# Altium PCB CM4IOv5.PcbDoc (part 4 of 4)
Units mm, origin at the board's own origin, x right, y up, seen from the top; angles counter-clockwise.
Board outline 160 x 90 mm, 4 copper layers (F.Cu, In1.Cu, In2.Cu, B.Cu); 151 components, 247 nets, 944 pads, 782 vias.
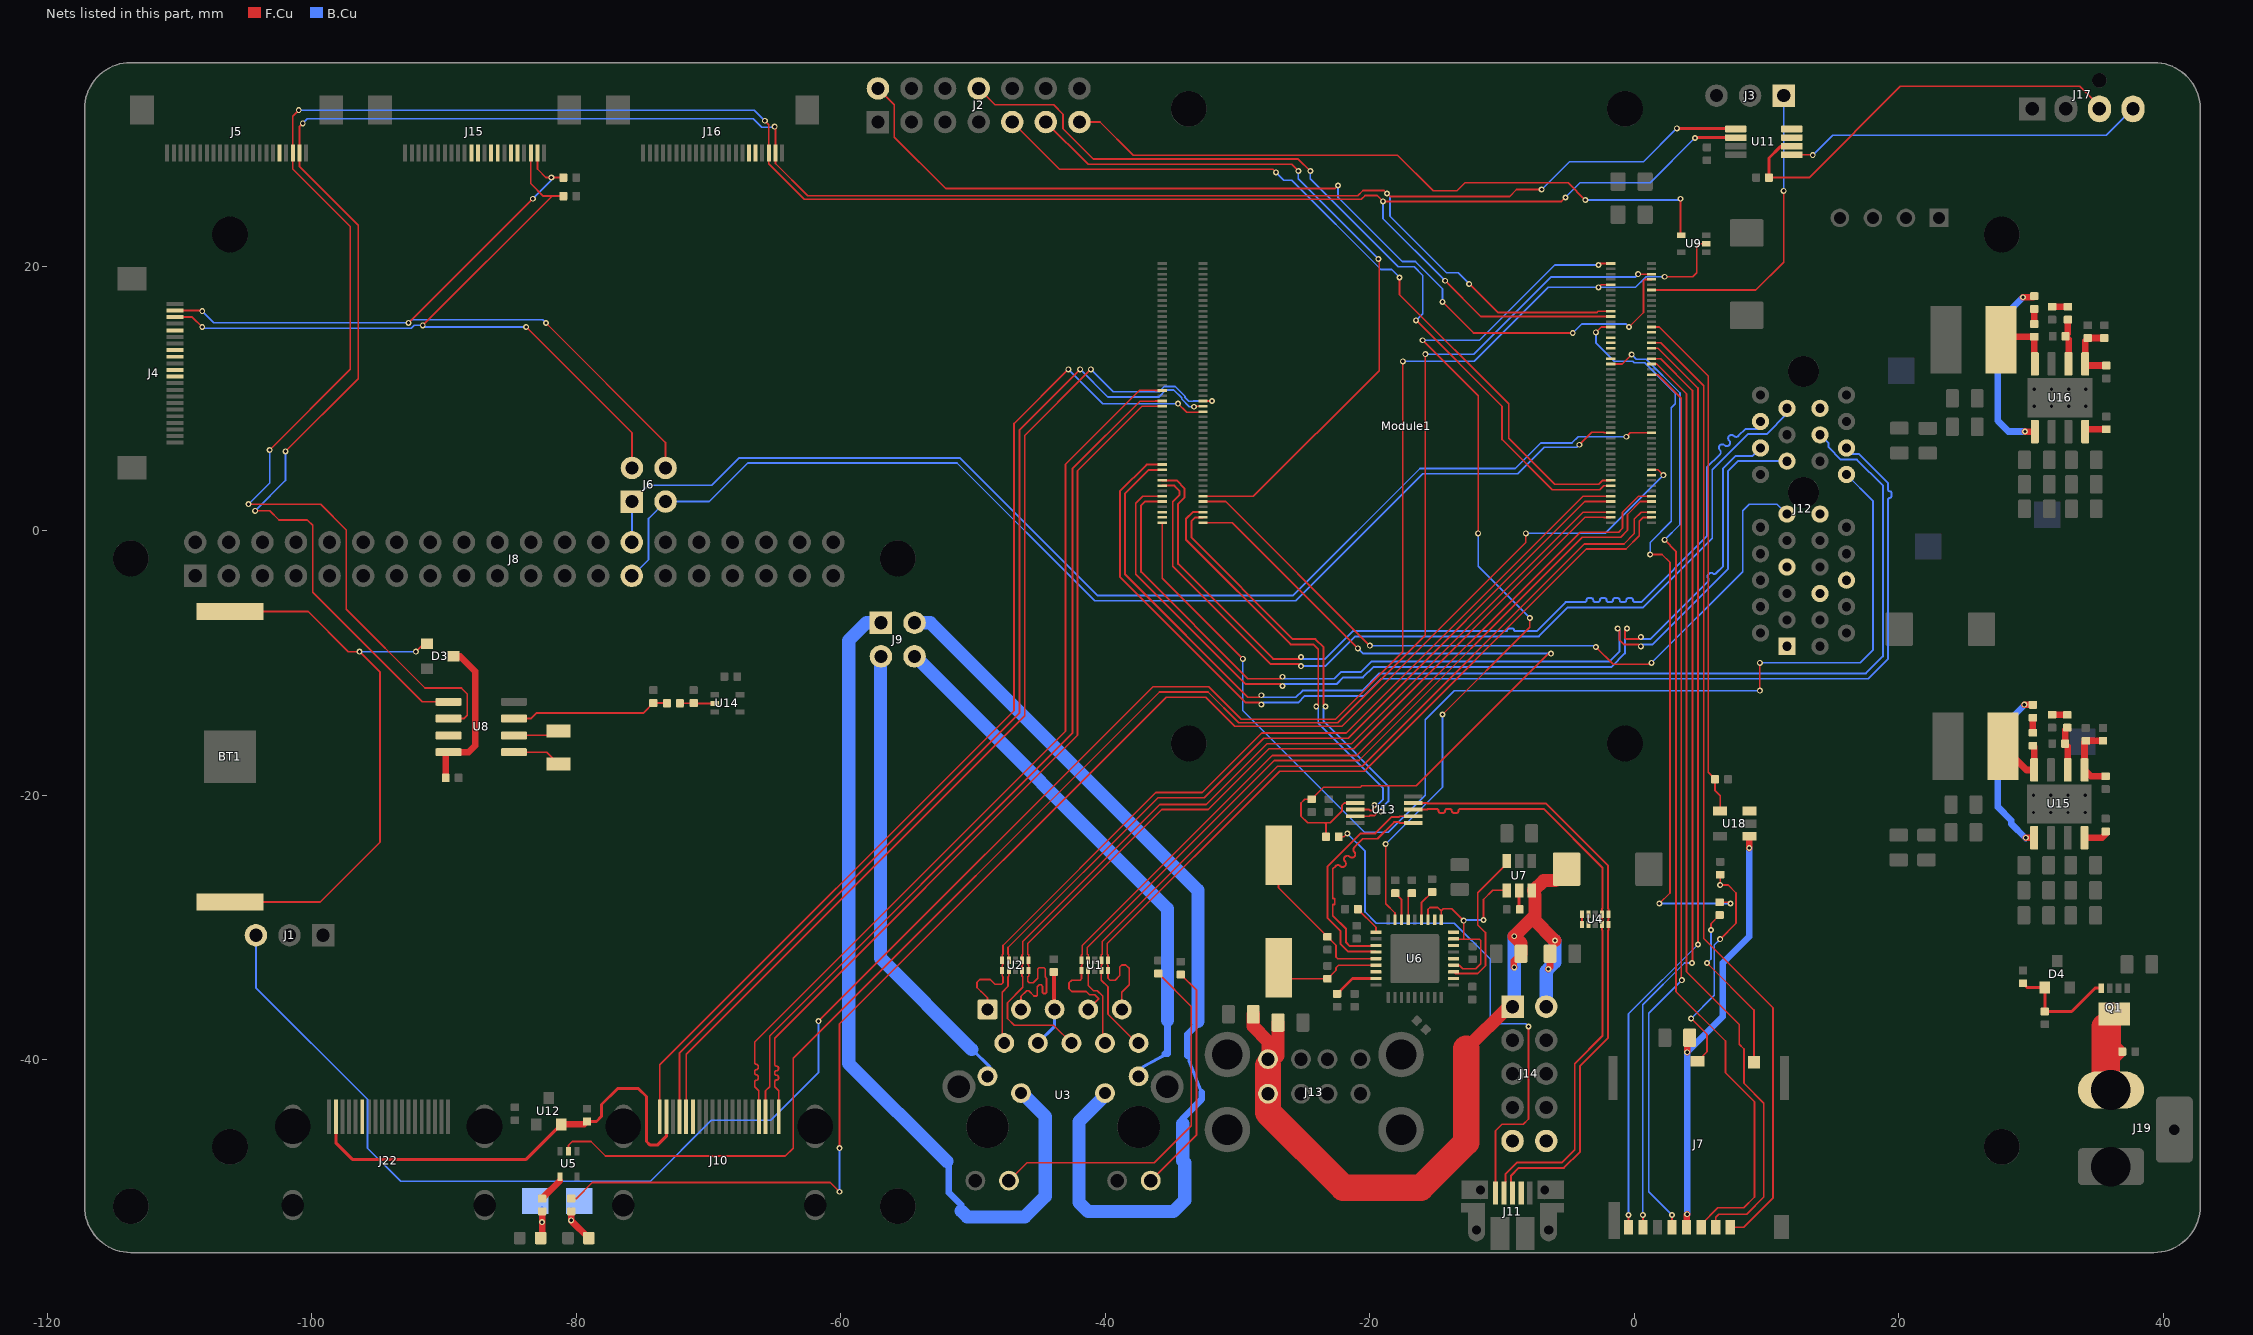
[diagram p6: the nets of this part, all layers, seen from the top]

## Via types
v1: diameter 0.45, hole 0.25, F.Cu to B.Cu, tented both sides, 782 vias

## Nets (pads, with @x,y where several pads share a name; then routed paths per layer and width w, separated by ;. In a path a pad name is that pad's centre, name@x,y a point inside that pad or via, vN(x,y) a via of type N, cw(c..) or ccw(c..) an arc to the next point about the centre after c; other vN are vias at no path point) (continued)
HDMI1_D1_P: J10.4 Module1.152 | length 69.4
  F.Cu w0.127: J10.4@-66.2,-44.32 -66.2,-42.37 -66.51,-42.06 -66.51,-41.69 -66.507,-41.662 -66.498,-41.636 -66.483,-41.612 -66.463,-41.592 -66.439,-41.577 -66.413,-41.568 -66.357,-41.562 -66.331,-41.553 -66.307,-41.538 -66.287,-41.518 -66.272,-41.494 -66.263,-41.468 -66.26,-41.44 -66.26,-41.29 -66.263,-41.262 -66.272,-41.236 -66.287,-41.212 -66.307,-41.192 -66.331,-41.177 -66.357,-41.168 -66.413,-41.162 -66.439,-41.153 -66.463,-41.138 -66.483,-41.118 -66.498,-41.094 -66.507,-41.068 -66.51,-41.04 -66.51,-40.89 -66.507,-40.862 -66.498,-40.836 -66.483,-40.812 -66.463,-40.792 -66.439,-40.777 -66.413,-40.768 -66.357,-40.762 -66.331,-40.753 -66.307,-40.738 -66.287,-40.718 -66.272,-40.694 -66.263,-40.668 -66.26,-40.64 -66.26,-40.49 -66.263,-40.462 -66.272,-40.436 -66.287,-40.412 -66.307,-40.392 -66.331,-40.377 -66.357,-40.368 -66.413,-40.362 -66.439,-40.353 -66.463,-40.338 -66.483,-40.318 -66.498,-40.294 -66.507,-40.268 -66.51,-40.24 -66.51,-38.679 -43.01,-15.179 -43.01,5.021 -37.421,10.61 -36.235,10.61 -36.225,10.6 Module1.152@-35.7,10.6
HDMI1_D2_N: J10.3 Module1.148 | length 67.5
  F.Cu w0.127: J10.3@-65.7,-44.32 -65.7,-42.37 -65.39,-42.06 -65.39,-38.221 -42.49,-15.321 -42.49,4.679 -37.379,9.79 -36.235,9.79 -36.225,9.8 Module1.148@-35.7,9.8
HDMI1_D2_P: J10.1 Module1.146 | length 67.5
  F.Cu w0.127: J10.1@-64.7,-44.32 -64.7,-42.37 -65.01,-42.06 -65.01,-41.69 -65.006,-41.658 -64.996,-41.627 -64.978,-41.6 -64.956,-41.577 -64.928,-41.56 -64.898,-41.549 -64.833,-41.542 -64.803,-41.531 -64.775,-41.514 -64.752,-41.491 -64.735,-41.464 -64.724,-41.433 -64.721,-41.401 -64.721,-41.34 -64.724,-41.308 -64.735,-41.277 -64.752,-41.25 -64.775,-41.227 -64.803,-41.21 -64.833,-41.199 -64.898,-41.192 -64.928,-41.181 -64.956,-41.164 -64.978,-41.141 -64.996,-41.114 -65.006,-41.083 -65.01,-41.051 -65.01,-40.99 -65.006,-40.958 -64.996,-40.927 -64.978,-40.9 -64.956,-40.877 -64.928,-40.86 -64.898,-40.849 -64.833,-40.842 -64.803,-40.831 -64.775,-40.814 -64.752,-40.791 -64.735,-40.764 -64.724,-40.733 -64.721,-40.701 -64.721,-40.64 -64.724,-40.608 -64.735,-40.577 -64.752,-40.55 -64.775,-40.527 -64.803,-40.51 -64.833,-40.499 -64.898,-40.492 -64.928,-40.481 -64.956,-40.464 -64.978,-40.441 -64.996,-40.414 -65.006,-40.383 -65.01,-40.351 -65.01,-38.379 -42.11,-15.479 -42.11,4.521 -37.231,9.4 Module1.146@-35.7,9.4
HDMI1_HOTPLUG: J10.19 Module1.143 | length 80.8
  F.Cu w0.13: J10.19@-73.7,-44.32 -73.7,-40.4 -46.9,-13.6 -46.9,8.1 v1(-42.8,12.2) ; v1(-34.5,9.6) -33.851,8.951 Module1.143@-32.669,8.951
  B.Cu w0.13: v1(-42.8,12.2) -40.2,9.6 v1(-34.5,9.6)
HDMI1_SCL: J10.15 Module1.147 | length 80.4
  F.Cu w0.13: J10.15@-71.7,-44.32 -71.7,-39.6 -46.1,-14 -46.1,7.2 v1(-41.1,12.2) ; Module1.147@-32.62,9.8 -31.934,9.8 v1(-31.93,9.804)
  B.Cu w0.13: v1(-41.1,12.2) -39.4,10.5 -35.932,10.5 -35.532,10.9 -34.722,10.9 -33.969,10.148 -33.969,10.059 -33.698,9.787 -33.348,9.787 -33.331,9.804 v1(-31.93,9.804)
HDMI1_SDA: J10.16 Module1.145 | length 80
  F.Cu w0.13: J10.16@-72.2,-44.32 -72.2,-39.5 -46.5,-13.8 -46.5,7.6 v1(-41.9,12.2) ; v1(-33.296,9.371) -33.267,9.4 Module1.145@-32.62,9.4
  B.Cu w0.13: v1(-41.9,12.2) -39.8,10.1 -35.965,10.1 -35.425,10.64 -34.829,10.64 -34.229,10.04 -34.229,9.951 -33.649,9.371 v1(-33.296,9.371)
HDMI_5v: C13.1 J10.18 J22.18 U12.2 | length 34.4
  F.Cu w0.23: J22.18@-98.2,-44.82 -98.2,-46.3 -96.95,-47.55 -83.8,-47.55 U12.2@-81.15,-44.9 ; C13.1@-79.2,-44.685 -78.485,-44.685 -78.1,-44.3 -78.1,-43.4 -76.9,-42.2 -75.3,-42.2 -74.7,-42.8 -74.7,-46.2 -74.45,-46.45 -73.85,-46.45 -73.2,-45.8 J10.18@-73.2,-44.82
  F.Cu w0.5: U12.2@-81.15,-44.9 C13.1@-79.415,-44.9
ID_SC: J6.1 J8.28 Module1.35 | length 90.9
  F.Cu w0.13: v1(-0.6,7.1) -0.3,7.4 Module1.35@1.3,7.4
  B.Cu w0.13: J8.28@-75.8,-0.87 J6.1@-75.8,2.2 -74.56,3.44 -69.76,3.44 -67.7,5.5 -51,5.5 -40.6,-4.9 -25.8,-4.9 -16.2,4.7 -9,4.7 -7.074,6.626 -4.715,6.626 -4.241,7.1 v1(-0.6,7.1)
ID_SD: J6.3 J8.27 Module1.36 | length 89
  F.Cu w0.13: v1(-4.153,6.495) -3.202,7.446 -2.311,7.446 -2.265,7.4 Module1.36@-1.78,7.4
  B.Cu w0.13: J8.27@-75.81,-3.47 -74.55,-2.21 -74.55,0.91 J6.3@-73.26,2.2 -69.963,2.2 -67.043,5.12 -51.22,5.12 -40.8,-5.3 -25.6,-5.3 -16,4.3 -8.8,4.3 -6.804,6.296 -4.352,6.296 v1(-4.153,6.495)
Net-(BT1-Pad1): BT1.1 D3.1 | length 44.4
  F.Cu w0.13: BT1.1@-106.2,-28.085 -99.385,-28.085 -94.85,-23.55 -94.85,-10.7 v1(-96.4,-9.15) -97.25,-9.15 -100.285,-6.115 BT1.1@-106.2,-6.115 ; v1(-92.15,-9.15) D3.1@-91.55,-8.55
  B.Cu w0.13: v1(-96.4,-9.15) v1(-92.15,-9.15)
Net-(C1-Pad1): C1.1 U3.4 U3.5 | length 5.8
  F.Cu w0.3: U3.5@-43.9,-36.145 C1.1@-43.9,-33.385
  B.Cu w0.23: U3.4@-45.105,-38.75 -43.835,-37.48 U3.5@-43.835,-36.21
Net-(C8-Pad1): C8.1 U6.33 Y1.1 | length 7.1
  F.Cu w0.13: Y1.1@-26.065,-33.885 C8.1@-23.2,-33.885 -22.557,-33.242 -22.557,-33.058 -22.368,-32.868 U6.33@-19.533,-32.868
Net-(C9-Pad1): C9.1 U6.32 Y1.2 | length 12.6
  F.Cu w0.13: Y1.2@-26.9,-24.55 -26.9,-27.015 C9.1@-23.2,-30.715 -22.557,-31.357 -22.557,-32.243 -22.432,-32.368 U6.32@-19.533,-32.368
Net-(C24-Pad1): C24.1 R20.1 U14.2 | length 2.6
  F.Cu w0.13: C24.1@-72.177,-13.056 R20.1@-71.161,-13.056 ; R20.1@-71.099,-13.072 U14.2@-69.532,-13.072
Net-(C29-Pad1): C29.1 R22.2 | length 1.1
  F.Cu w0.5: R22.2@30.15,-15.292 C29.1@30.15,-14.148
Net-(C29-Pad2): C29.2 U15.1 | length 13.1
  F.Cu w0.5: v1(29.5,-13.163) 29.515,-13.177 C29.2@30.15,-13.177 ; v1(29.613,-23.225) U15.1@30.245,-23.225
  B.Cu w0.5: v1@29.5,-13.2 27.5,-15.2 27.5,-20.9 28.5,-21.9 28.5,-22.15 v1@29.613,-23.263
Net-(C36-Pad1): C36.1 J19.1 Q1.5 | length 12.3
  F.Cu w1: 35.6,-37.5 35.6,-37.255 Q1.5@36.3,-36.555 36.3,-39 36.7,-39.4 36.25,-39.85 J19.1@36.25,-42.3
  F.Cu w2: 35.6,-37.5 35.6,-41.4 36.05,-41.85 J19.1@36.05,-42.3
Net-(C40-Pad2): C40.2 D4.2 Q1.4 R26.1 | length 8.6
  F.Cu w0.23: C40.2@29.4,-34.235 29.715,-34.55 D4.2@31.05,-34.55 R26.1@31.05,-36.365 33.085,-36.365 34.85,-34.6 Q1.4@35.325,-34.6
Net-(C46-Pad1): C46.1 D3.3 U8.8 | length 11.7
  F.Cu w0.5: C46.1@-89.885,-18.7 U8.8@-89.885,-16.965 ; U8.8@-89.675,-16.755 -88.155,-16.755 -87.65,-16.25 -87.65,-10.65 -88.8,-9.5 D3.3@-89.3,-9.5
Net-(C57-Pad1): C57.1 R9.2 | length 1.1
  F.Cu w0.5: R9.2@30.25,15.635 C57.1@30.25,16.765
Net-(C57-Pad2): C57.2 U16.1 | length 14
  F.Cu w0.5: v1(29.4,17.65) C57.2@30.165,17.65 ; v1(29.55,7.5) 29.563,7.488 U16.1@30.295,7.488
  B.Cu w0.5: v1(29.4,17.65) 27.5,15.75 27.5,8.3 28.3,7.5 v1(29.55,7.5)
Net-(C58-Pad1): C58.1 U16.4 | length 1.4
  F.Cu w0.5: U16.4@34.283,7.665 C58.1@35.7,7.665
Net-(C59-Pad1): C59.1 R25.1 U16.6 | length 2.9
  F.Cu w0.5: C59.1@32.8,14.88 R25.1@32.8,15.915 ; U16.6@32.85,12.628 C59.1@32.85,14.47
Net-(C60-Pad1): C60.1 R25.2 | length 1.2
  F.Cu w0.5: C60.1@31.6,16.935 R25.2@32.75,16.935
Net-(C61-Pad2): C61.2 R27.2 R28.1 U16.5 | length 4.5
  F.Cu w0.5: U16.5@34.105,12.612 R27.2@34.105,14.37 ; U16.5@34.233,12.485 R28.1@35.7,12.485 ; R27.2@34.3,14.565 C61.2@35.55,14.565
Net-(C62-Pad1): C62.1 U15.4 | length 1.7
  F.Cu w0.5: U15.4@34.055,-23.225 35.388,-23.225 C62.1@35.65,-22.962
Net-(C63-Pad1): C63.1 R23.1 U15.6 | length 2.8
  F.Cu w0.5: C63.1@32.585,-16.113 R23.1@32.585,-15.062 ; U15.6@32.785,-18.1 C63.1@32.785,-16.312
Net-(C64-Pad1): C64.1 R23.2 | length 1.2
  F.Cu w0.5: C64.1@31.6,-13.928 R23.2@32.75,-13.928
Net-(C65-Pad2): C65.2 R24.2 R30.1 U15.5 | length 5.2
  F.Cu w0.5: R24.2@34.055,-15.993 U15.5@34.055,-18.1 34.533,-18.577 R30.1@35.65,-18.577 ; R24.2@34.15,-15.897 C65.2@35.45,-15.897
Net-(D1-Pad1): D1.1 R10.1 TP5.1 | length 3
  F.Cu w0.5: D1.1@-82.6,-53.388 v1(-82.6,-52.3) R10.1@-82.6,-51.485
  B.Cu w0.23: v1(-82.6,-52.3) TP5.1@-82.6,-51.2
Net-(D2-Pad1): D2.1 R1.1 TP3.1 | length 3.4
  F.Cu w0.5: R1.1@-80.4,-51.485 v1(-80.4,-52.162) D2.1@-79.062,-53.5
  B.Cu w0.23: v1(-80.4,-52.162) TP3.1@-80.4,-51.312
Net-(J2-Pad13): J2.13 U9.4 | length 51.1
  F.Cu w0.13: J2.13@-41.96,30.9 -40.4,30.9 -37.9,28.4 -17.9,28.4 -15.2,25.7 -13.4,25.7 -12.8,26.3 -5,26.3 v1(-3.7,25) ; U9.4@3.5,22.4 v1(3.5,25.1)
  B.Cu w0.13: v1(-3.7,25) 3.4,25 v1(3.5,25.1)
Net-(J4-Pad11): J4.11
Net-(J4-Pad12): J4.12
Net-(J4-Pad14): J4.14
Net-(J4-Pad15): J4.15
Net-(J4-Pad18): J4.18
Net-(J5-Pad18): J5.18
Net-(J7-Pad9): J7.9 R18.2 | length 13
  F.Cu w0.13: v1(5.5,-32.7) 9.05,-36.25 J7.9@9.05,-40.21 ; v1(5.8,-30.2) 5.8,-29.72 R18.2@6.45,-29.07
  B.Cu w0.13: v1(5.5,-32.7) 5.8,-32.4 v1(5.8,-30.2)
Net-(J7-Pad10): J7.10 R17.2 | length 17.2
  F.Cu w0.13: v1(4.3,-36.9) 5.5,-38.1 5.5,-39.42 J7.10@4.785,-40.135 ; v1(6.5,-30.9) 7.7,-29.7 7.7,-27.4 7.1,-26.8 v1(6.5,-26.8) R17.2@6.5,-26.02
  B.Cu w0.13: v1(4.3,-36.9) 6.06,-35.14 6.06,-31.34 v1(6.5,-30.9)
Net-(J10-Pad14): J10.14
Net-(J11-Pad1): J11.1 R8.1 | length 40.6
  F.Cu w0.13: R8.1@-22.35,-23.15 -21.95,-23.15 v1(-21.7,-22.9) ; J11.1@-10.5,-50.08 -10.5,-45.4 -10,-44.9 -8.4,-44.9 -8,-44.5 v1(-8,-37.5)
  B.Cu w0.13: v1(-21.7,-22.9) -20.355,-24.245 -20.355,-28.845 -19.5,-29.7 -13.6,-29.7 -10.9,-32.4 -10.9,-37.3 -8.2,-37.3 v1(-8,-37.5)
Net-(J11-Pad4): J11.4
Net-(J12-PadA1): J12.A1
Net-(J12-PadA7): J12.A7
Net-(J12-PadB5): J12.B5
Net-(J12-PadB6): J12.B6
Net-(J12-PadB11): J12.B11
Net-(J12-PadB17): J12.B17
Net-(J14-Pad9): J14.9
Net-(J14-Pad10): J14.10
Net-(J15-Pad11): J15.11
Net-(J15-Pad12): J15.12
Net-(J15-Pad14): J15.14
Net-(J15-Pad15): J15.15
Net-(J15-Pad17): J15.17
Net-(J15-Pad18): J15.18
Net-(J16-Pad17): J16.17
Net-(J16-Pad18): J16.18
Net-(J17-Pad3): J17.3 R21.1 U11.6 | length 31.2
  F.Cu w0.13: R21.1@10.185,26.7 13.225,26.7 20.125,33.6 33.7,33.6 J17.3@35.18,32.12
  F.Cu w0.23: R21.1@10.185,26.7 10.185,28.185 11,29 11.025,29 U11.6@11.1,29.075
Net-(J17-Pad4): J17.4 U11.5 | length 27.2
  F.Cu w0.13: U11.5@11.913,28.425 13.475,28.425 v1(13.5,28.4)
  B.Cu w0.13: v1(13.5,28.4) 15,29.9 35.7,29.9 J17.4@37.7,31.9
Net-(J22-Pad14): J22.14
Net-(L3-Pad1): L3.1 R22.1 U15.8 | length 4.9
  F.Cu w0.5: L3.1@27.875,-16.312 29.663,-18.1 U15.8@30.245,-18.1 R22.1@30.245,-16.358
Net-(L5-Pad1): L5.1 R9.1 U16.8 | length 4.3
  F.Cu w0.5: L5.1@27.94,14.665 R9.1@30.25,14.665 U16.8@30.25,12.658
Net-(Module1-Pad19): Module1.19
Net-(Module1-Pad21): Module1.21 R1.2 | length 116.6
  F.Cu w0.13: R1.2@-80.4,-50.515 -80.015,-50.515 -78.8,-49.3 -60.8,-49.3 v1(-60.1,-50) ; v1(-60.1,-46.7) -60.1,-37.3 -35.4,-12.6 -32.403,-12.6 -30.203,-14.8 -22.1,-14.8 -8.2,-0.9 v1(-8.2,-0.2) ; Module1.21@1.3,4.6 1.8,4.6 v1(2.2,4.2)
  B.Cu w0.13: v1(-60.1,-50) v1(-60.1,-46.7) ; v1(-8.2,-0.2) -2.2,-0.2 v1(2.2,4.2)
Net-(Module1-Pad64): Module1.64
Net-(Module1-Pad68): Module1.68
Net-(Module1-Pad70): Module1.70
Net-(Module1-Pad72): Module1.72
Net-(Module1-Pad73): Module1.73
Net-(Module1-Pad104): Module1.104
Net-(Module1-Pad106): Module1.106
Net-(R2-Pad1): R2.1 U3.16 | length 28.1
  F.Cu w0.13: U3.16@-47.29,-49.16 -45.93,-47.8 -36.3,-47.8 -33.5,-45 -33.5,-35.985 R2.1@-36,-33.485
Net-(R3-Pad1): R3.1 U3.18 | length 17.5
  F.Cu w0.13: U3.18@-36.57,-49.16 -33.1,-45.69 -33.1,-34.77 R3.1@-34.3,-33.57
Net-(R10-Pad2): R10.2 U5.4 | length 1.9
  F.Cu w0.5: R10.2@-82.6,-50.515 U5.4@-81.25,-49.165
Net-(R12-Pad1): R12.1 U6.24 | length 2.1
  F.Cu w0.13: U6.24@-17.096,-29.43 -17.096,-27.7 R12.1@-16.812,-27.416
Net-(R13-Pad1): R13.1 U6.22 | length 2.4
  F.Cu w0.13: U6.22@-16.096,-29.43 -16.096,-28.137 R13.1@-15.288,-27.329
Net-(R14-Pad1): R14.1 U6.28 | length 2.3
  F.Cu w0.13: R14.1@-20.899,-28.622 -19.533,-29.987 U6.28@-19.533,-30.368
Net-(R15-Pad2): R15.2 U6.35 | length 3.4
  F.Cu w0.23: R15.2@-22.475,-35.04 -21.303,-33.868 U6.35@-19.533,-33.868
Net-(R16-Pad1): R16.1 U6.25 | length 2.2
  F.Cu w0.13: R16.1@-18.082,-27.416 -17.596,-27.902 U6.25@-17.596,-29.43
Net-(R36-Pad1): R36.1 U7.5 | length 1.4
  F.Cu w0.23: R36.1@-8.7,-28.615 U7.5@-8.7,-27.2
Net-(U4-Pad1): U4.1 U4.10 | length 0.8
  F.Cu w0.13: U4.1@-3.95,-29.785 U4.10@-3.95,-29.015
Net-(U4-Pad2): U4.2 U4.9 | length 0.8
  F.Cu w0.13: U4.2@-3.45,-29.785 U4.9@-3.45,-29.015
Net-(U6-Pad11): U6.11
Net-(U6-Pad14): U6.14
Net-(U6-Pad16): U6.16
Net-(U6-Pad18): U6.18
Net-(U6-Pad20): U6.20
Net-(U6-Pad34): U6.34
Net-(U8-Pad1): U8.1 Y2.2 | length 3.7
  F.Cu w0.13: U8.1@-84.725,-16.755 -82.245,-16.755 Y2.2@-81.35,-17.65
Net-(U8-Pad2): U8.2 Y2.1 | length 3
  F.Cu w0.13: U8.2@-84.725,-15.485 Y2.1@-81.685,-15.485
Net-(U8-Pad7): U8.7
Net-(U11-Pad7): U11.7
Net-(U11-Pad8): U11.8
Net-(U18-Pad3): U18.3
nEXTRST: Module1.100 U6.26 | length 68.6
  F.Cu w0.13: v1(-18.8,-23.7) -18.8,-28.214 -18.096,-28.918 U6.26@-18.096,-29.43 ; v1(-16,14.4) -11.8,10.2 v1(-11.8,-0.2) ; v1(-14.5,-13.9) -7.9,-7.3 v1(-7.9,-6.6) ; v1(-2.7,20.095) -2.595,20.2 Module1.100@-1.78,20.2
  B.Cu w0.13: v1(-18.8,-23.7) -14.5,-19.4 v1(-14.5,-13.9) ; v1(-16,14.4) -11.7,14.4 -6.005,20.095 v1(-2.7,20.095) ; v1(-11.8,-0.2) -11.8,-2.7 v1(-7.9,-6.6)
nOCS1: U6.13 U6.17 U6.19 U6.21 U7.4 | length 17.4
  F.Cu w0.13: U6.21@-15.596,-29.43 -15.596,-28.646 -15.45,-28.5 -14.85,-28.5 -14.596,-28.754 ; U6.19@-14.596,-29.43 -14.596,-28.754 ; U6.13@-13.658,-32.868 -13.24,-32.868 -12.978,-33.13 -11.98,-33.13 -11.6,-32.75 -11.6,-31 -11.7,-30.9 -12.95,-30.9 ; U6.17@-13.626,-30.9 -12.95,-30.9 ; v1(-11.4,-29.45) -11.4,-27.9 -10.7,-27.2 U7.4@-9.65,-27.2 ; -14.596,-28.754 -14.596,-28.746 -14.45,-28.6 -13.8,-28.6 v1(-12.9,-29.5) -12.9,-30.85 -12.95,-30.9
  B.Cu w0.13: v1(-12.9,-29.5) -12.85,-29.45 v1(-11.4,-29.45)
nPWR_LED: Module1.95 U5.2 | length 128.9
  F.Cu w0.13: U5.2@-80.6,-46.95 -80.6,-46.495 -80.305,-46.2 -78.9,-46.2 -77.8,-47.3 -64.2,-47.3 -63.6,-46.7 -63.6,-39.9 -35.9,-12.2 -32.235,-12.2 -29.915,-14.52 -22.42,-14.52 -15.8,-7.9 v1(-15.8,13.35) ; v1(0.3,19.4) Module1.95@1.3,19.4
  B.Cu w0.13: v1(-15.8,13.35) -12.15,13.35 -6.325,19.175 0.075,19.175 v1(0.3,19.4)
nRPIBOOT: J2.2 Module1.93 | length 72.1
  F.Cu w0.13: J2.2@-57.2,33.44 -55.96,32.2 -55.96,29.76 -52.075,25.875 -22.625,25.875 v1(-22.4,26.1) ; v1(-14.5,17.3) -12.15,14.95 v1(-4.65,14.95) ; v1(-0.4,15.4) 0.7,16.5 0.7,18.88 0.82,19 Module1.93@1.3,19
  B.Cu w0.13: v1(-22.4,26.1) -22.4,25.2 -17.55,20.35 -16.55,20.35 -14.5,18.3 v1(-14.5,17.3) ; v1(-4.65,14.95) -3.975,15.625 -0.625,15.625 v1(-0.4,15.4)
nRTC_INT: C24.2 R19.1 U8.3 | length 12
  F.Cu w0.13: U8.3@-84.725,-14.215 -83.465,-14.215 -83.05,-13.8 -74.953,-13.8 R19.1@-74.186,-13.033 C24.2@-73.17,-13.033
PCIE_CLK_N: J12.A14 Module1.112 | length 73
  F.Cu w0.147: Module1.112@-35.7,2.6 -37.183,2.6 -37.7,2.083 -37.7,-3.283 -29.383,-11.6 -26.75,-11.6 v1(-26.6,-11.75) ; v1(-0.55,-7.4) -0.7,-7.55 -0.7,-8.117 -0.617,-8.2 0.35,-8.2 v1(0.5,-8.05)
  B.Cu w0.147: v1(-26.6,-11.75) -26.45,-11.6 -22.517,-11.6 -22.017,-11.1 -20.517,-11.1 -19.717,-10.3 -1.717,-10.3 -0.7,-9.283 -0.7,-7.55 v1(-0.55,-7.4) ; v1(0.5,-8.05) 0.65,-8.2 1.217,-8.2 5.3,-4.117 5.583,-3.835 5.607,-3.804 5.624,-3.769 5.633,-3.73 5.633,-3.691 5.624,-3.653 5.607,-3.618 5.558,-3.556 5.541,-3.521 5.532,-3.483 5.532,-3.444 5.541,-3.406 5.558,-3.37 5.583,-3.34 5.689,-3.234 5.719,-3.209 5.755,-3.192 5.793,-3.183 5.832,-3.183 5.87,-3.192 5.905,-3.209 5.967,-3.258 6.002,-3.275 6.04,-3.284 6.079,-3.284 6.118,-3.275 6.153,-3.258 6.184,-3.234 6.7,-2.717 6.7,4.683 7.667,5.65 8.95,5.65 J12.A14@9.55,6.25
PCIE_CLK_nREQ: J12.B12 Module1.102 | length 92.6
  F.Cu w0.13: Module1.102@-35.7,0.6 -35.7,-3.6 v1(-29.6,-9.7) ; v1(9.5,-12.1) v1(9.5,-10)
  B.Cu w0.13: v1(-29.6,-9.7) -29.6,-13.6 -20.4,-22.8 -18.6,-22.8 -15.8,-20 -15.8,-14.3 -13.6,-12.1 v1(9.5,-12.1) ; v1(9.5,-10) 17.1,-10 18.05,-9.05 18.05,2.25 J12.B12@16.05,4.25
PCIE_CLK_P: J12.A13 Module1.110 | length 73
  F.Cu w0.147: Module1.110@-35.7,2.2 -37.017,2.2 -37.3,1.917 -37.3,-3.117 -29.217,-11.2 -26.75,-11.2 v1(-26.6,-11.05) ; v1(-1.25,-7.4) -1.1,-7.55 -1.1,-8.283 -0.783,-8.6 0.35,-8.6 v1(0.5,-8.75)
  B.Cu w0.147: v1(-26.6,-11.05) -26.45,-11.2 -22.683,-11.2 -22.183,-10.7 -20.683,-10.7 -19.883,-9.9 -1.883,-9.9 -1.1,-9.117 -1.1,-7.55 v1(-1.25,-7.4) ; v1(0.5,-8.75) 0.65,-8.6 1.383,-8.6 7.1,-2.883 7.1,4.517 7.833,5.25 J12.A13@11.55,5.25
PCIE_nRST: J12.A11 Module1.109 | length 57.3
  F.Cu w0.13: Module1.109@-32.62,2.2 -30.9,2.2 v1(-20,-8.7) ; v1(-2.9,-8.8) -1.6,-10.1 1.2,-10.1 v1(1.3,-10)
  B.Cu w0.13: v1(-20,-8.7) -3,-8.7 v1(-2.9,-8.8) ; v1(1.3,-10) 8.2,-3.1 8.2,1.5 8.7,2 10.8,2 J12.A11@11.55,1.25
PCIE_RX_N: J12.A16 Module1.118 | length 67.9
  F.Cu w0.147: Module1.118@-35.7,3.8 -34.617,3.8 -34,3.183 -34,2.517 -34.5,2.017 -34.5,-2.517 -27.317,-9.7 -25.35,-9.7 v1(-25.2,-9.55)
  B.Cu w0.147: v1(-25.2,-9.55) -25.05,-9.7 -23.383,-9.7 -21.283,-7.6 -9.7,-7.6 -9.678,-7.597 -9.657,-7.59 -9.638,-7.578 -9.622,-7.562 -9.61,-7.543 -9.603,-7.522 -9.597,-7.478 -9.59,-7.457 -9.578,-7.438 -9.562,-7.422 -9.543,-7.41 -9.522,-7.403 -9.5,-7.4 -9.2,-7.4 -9.178,-7.403 -9.157,-7.41 -9.138,-7.422 -9.122,-7.438 -9.11,-7.457 -9.103,-7.478 -9.097,-7.522 -9.09,-7.543 -9.078,-7.562 -9.062,-7.578 -9.043,-7.59 -9.022,-7.597 -9,-7.6 -7.383,-7.6 -5.183,-5.4 -3.75,-5.4 -3.717,-5.396 -3.685,-5.385 -3.656,-5.367 -3.633,-5.344 -3.615,-5.315 -3.604,-5.283 -3.596,-5.217 -3.585,-5.185 -3.567,-5.156 -3.544,-5.133 -3.515,-5.115 -3.483,-5.104 -3.45,-5.1 -3.25,-5.1 -3.217,-5.104 -3.185,-5.115 -3.156,-5.133 -3.133,-5.156 -3.115,-5.185 -3.104,-5.217 -3.096,-5.283 -3.085,-5.315 -3.067,-5.344 -3.044,-5.367 -3.015,-5.385 -2.983,-5.396 -2.95,-5.4 -2.75,-5.4 -2.717,-5.396 -2.685,-5.385 -2.656,-5.367 -2.633,-5.344 -2.615,-5.315 -2.604,-5.283 -2.596,-5.217 -2.585,-5.185 -2.567,-5.156 -2.544,-5.133 -2.515,-5.115 -2.483,-5.104 -2.45,-5.1 -2.25,-5.1 -2.217,-5.104 -2.185,-5.115 -2.156,-5.133 -2.133,-5.156 -2.115,-5.185 -2.104,-5.217 -2.096,-5.283 -2.085,-5.315 -2.067,-5.344 -2.044,-5.367 -2.015,-5.385 -1.983,-5.396 -1.95,-5.4 -1.75,-5.4 -1.717,-5.396 -1.685,-5.385 -1.656,-5.367 -1.633,-5.344 -1.615,-5.315 -1.604,-5.283 -1.596,-5.217 -1.585,-5.185 -1.567,-5.156 -1.544,-5.133 -1.515,-5.115 -1.483,-5.104 -1.45,-5.1 -1.25,-5.1 -1.217,-5.104 -1.185,-5.115 -1.156,-5.133 -1.133,-5.156 -1.115,-5.185 -1.104,-5.217 -1.096,-5.283 -1.085,-5.315 -1.067,-5.344 -1.044,-5.367 -1.015,-5.385 -0.983,-5.396 -0.95,-5.4 -0.75,-5.4 -0.717,-5.396 -0.685,-5.385 -0.656,-5.367 -0.633,-5.344 -0.615,-5.315 -0.604,-5.283 -0.596,-5.217 -0.585,-5.185 -0.567,-5.156 -0.544,-5.133 -0.515,-5.115 -0.483,-5.104 -0.45,-5.1 -0.25,-5.1 -0.217,-5.104 -0.185,-5.115 -0.156,-5.133 -0.133,-5.156 -0.115,-5.185 -0.104,-5.217 -0.096,-5.283 -0.085,-5.315 -0.067,-5.344 -0.044,-5.367 -0.015,-5.385 0.017,-5.396 0.05,-5.4 0.517,-5.4 5.5,-0.417 5.5,4.783 6.469,5.752 6.504,5.796 6.529,5.846 6.541,5.901 6.541,5.957 6.529,6.012 6.504,6.062 6.434,6.15 6.41,6.2 6.398,6.255 6.398,6.311 6.41,6.365 6.434,6.416 6.469,6.459 6.513,6.494 6.564,6.519 6.618,6.531 6.674,6.531 6.729,6.519 6.779,6.494 6.867,6.424 6.917,6.4 6.972,6.388 7.028,6.388 7.082,6.4 7.133,6.424 7.176,6.459 7.211,6.503 7.236,6.554 7.248,6.608 7.248,6.664 7.236,6.719 7.211,6.769 7.142,6.857 7.117,6.907 7.105,6.962 7.105,7.018 7.117,7.072 7.142,7.123 7.176,7.166 7.22,7.201 7.271,7.226 7.325,7.238 7.381,7.238 7.436,7.226 7.486,7.201 7.574,7.132 7.624,7.107 7.679,7.095 7.735,7.095 7.789,7.107 7.84,7.132 7.884,7.166 8.417,7.7 J12.A16@9.434,7.7
PCIE_RX_P: J12.A17 Module1.116 | length 67.9
  F.Cu w0.147: Module1.116@-35.7,3.4 -34.783,3.4 -34.4,3.017 -34.4,2.683 -34.9,2.183 -34.9,-2.683 -27.483,-10.1 -25.35,-10.1 v1(-25.2,-10.25)
  B.Cu w0.147: v1(-25.2,-10.25) -23.367,-10.25 -21.117,-8 -7.217,-8 -5.017,-5.8 0.683,-5.8 5.9,-0.583 5.9,4.617 8.583,7.3 10.005,7.3 J12.A17@11.55,8.845
PCIE_TX_N: J12.B14 Module1.124 | length 91.6
  F.Cu w0.147: Module1.124@-35.7,5 -36.883,5 -38.9,2.983 -38.9,-3.483 -29.383,-13 -28.35,-13 v1(-28.2,-13.15)
  B.Cu w0.147: v1(-28.2,-13.15) -28.05,-13 -25.417,-13 -24.917,-12.5 -20.417,-12.5 -19.117,-11.2 17.683,-11.2 19.2,-9.683 19.2,2.35 19.203,2.378 19.212,2.404 19.227,2.428 19.247,2.448 19.271,2.463 19.297,2.472 19.353,2.478 19.379,2.487 19.403,2.502 19.423,2.522 19.438,2.546 19.447,2.572 19.45,2.6 19.45,2.85 19.447,2.878 19.438,2.904 19.423,2.928 19.403,2.948 19.379,2.963 19.353,2.972 19.297,2.978 19.271,2.987 19.247,3.002 19.227,3.022 19.212,3.046 19.203,3.072 19.2,3.1 19.2,3.583 16.983,5.8 J12.B14@16.066,5.8
PCIE_TX_P: J12.B15 Module1.122 | length 91.7
  F.Cu w0.147: Module1.122@-35.7,4.6 -36.717,4.6 -38.5,2.817 -38.5,-3.317 -29.217,-12.6 -28.35,-12.6 v1(-28.2,-12.45)
  B.Cu w0.147: v1(-28.2,-12.45) -28.05,-12.6 -25.583,-12.6 -25.083,-12.1 -20.583,-12.1 -19.283,-10.8 17.517,-10.8 18.8,-9.517 18.8,3.417 16.842,5.375 15.63,5.375 14.7,6.305 14.7,6.6 J12.B15@14.05,7.25
PWR1: U6.12 U7.3 | length 11.5
  F.Cu w0.13: U6.12@-13.658,-33.368 -13.533,-33.493 -11.843,-33.493 -11.25,-32.9 -11.25,-30.4 -11.825,-29.825 -11.825,-27.397 -11.747,-27.32 -11.747,-27.302 U7.3@-9.65,-25.205
RUN_PG: J1.3 Module1.92 U9.2 | length 170.6
  F.Cu w0.13: v1(-61.7,-37.1) -36.4,-11.8 -32.184,-11.8 -29.724,-14.26 -22.592,-14.26 -17.5,-9.168 v1(-17.5,12.8) ; v1(-2.7,18.4) -2.5,18.6 Module1.92@-1.78,18.6 ; v1(2.3,19.2) 4.422,19.2 4.72,19.498 4.72,21.425 4.995,21.7 U9.2@5.45,21.7
  B.Cu w0.13: J1.3@-104.24,-30.6 -104.24,-34.56 -95.8,-43 -95.8,-46.7 -93.3,-49.2 -74.4,-49.2 -69.8,-44.6 -65.3,-44.6 -61.7,-41 v1(-61.7,-37.1) ; v1(-17.5,12.8) -12.1,12.8 -6.5,18.4 v1(-2.7,18.4) 0.1,18.4 0.9,19.2 v1(2.3,19.2)
SCL0: J5.20 J16.20 Module1.80 U8.6 U11.2 | length 201.4
  F.Cu w0.13: v1@-104.7,2.1 v1(-104.8,2) -99.35,2 -97.4,0.05 -97.4,-5.95 -91.45,-11.9 -88.7,-11.9 -88.25,-12.35 -88.25,-13.95 -88.515,-14.215 U8.6@-89.675,-14.215 ; v1(-103.2,6.1) -97.1,12.2 -97.1,23 -101.45,27.35 J5.20@-101.45,28.55 -101.45,31.35 v1(-101,31.8) ; v1(-65.75,31) -65.45,30.7 J16.20@-65.45,28.55 -65.45,27.75 -62.765,25.065 -20.635,25.065 -20.356,25.344 -19.444,25.344 v1(-19,24.9) -5.5,24.9 v1(-5.2,25.2) ; v1(-14.3,18.9) -11.6,16.2 Module1.80@-1.78,16.2
  F.Cu w0.23: v1(4.6,29.7) 4.625,29.725 U11.2@7.688,29.725
  B.Cu w0.13: v1(-104.8,2) -103.2,3.6 v1(-103.2,6.1) ; v1(-101,31.8) -66.55,31.8 v1(-65.75,31) ; v1(-19,24.9) -19,23.6 v1(-14.3,18.9) ; v1(-5.2,25.2) -4.1,26.3 1.2,26.3 v1(4.6,29.7)
SCL1: J4.20 J6.2 J15.20 R7.2 | length 60
  F.Cu w0.13: J4.20@-110.35,16.15 -109.05,16.15 v1(-108.3,15.4) ; v1(-91.625,15.525) -81.85,25.3 ; v1(-83.8,15.4) -75.8,7.4 J6.2@-75.8,4.74 ; J15.20@-83.45,28.55 -83.45,26.25 -82.5,25.3 -81.85,25.3 ; R7.2@-80.985,25.3 -81.85,25.3
  B.Cu w0.13: v1(-108.3,15.4) -108.2,15.3 -92.5,15.3 -92.275,15.525 v1(-91.625,15.525) -91.5,15.4 v1(-83.8,15.4)
SD_CLK: J7.5 Module1.57 | length 67.5
  F.Cu w0.13: Module1.57@1.3,11.8 1.77,11.8 3.55,10.02 3.55,-33.95 v1(3.6,-34) ; v1(2.85,-51.75) 2.86,-51.76 J7.5@2.86,-52.675
  B.Cu w0.13: v1(2.85,-51.75) 1.1,-50 1.1,-36.5 v1(3.6,-34)
SD_CMD: J7.3 Module1.62 | length 75.7
  F.Cu w0.13: Module1.62@-1.78,12.6 -0.918,12.6 v1(-0.198,13.32) ; v1(2.3,-0.7) 3.15,-1.55 3.15,-34.85 6.9,-38.6 6.9,-41 9.1,-43.2 9.1,-50.4 8.283,-51.217 6.318,-51.217 J7.3@5.06,-52.475
  B.Cu w0.13: v1(-0.198,13.32) 0.162,12.96 0.908,12.96 3.46,10.408 3.46,0.46 v1(2.3,-0.7)
SD_DAT0: J7.7 Module1.63 | length 69.3
  F.Cu w0.13: v1(0.65,-51.75) 0.66,-51.76 J7.7@0.66,-52.675 ; Module1.63@1.3,13 2,13 4.4,10.6 4.4,-32.67 v1(4.37,-32.7)
  B.Cu w0.13: v1(0.65,-51.75) 0.65,-35.85 3.8,-32.7 v1(4.37,-32.7)
SD_DAT1: J7.8 Module1.67 | length 70.4
  F.Cu w0.13: J7.8@-0.44,-52.675 v1(-0.44,-51.75) ; Module1.67@1.3,13.8 1.8,13.8 4.82,10.78 v1(4.82,-31.3)
  B.Cu w0.13: v1(-0.44,-51.75) -0.44,-36.56 v1(4.82,-31.3)
SD_DAT2: J7.1 Module1.69 | length 73
  F.Cu w0.13: Module1.69@1.3,14.2 2,14.2 5.25,10.95 5.25,-30.85 10.5,-36.1 10.5,-50.45 8.275,-52.675 J7.1@7.26,-52.675
SD_DAT3: J7.2 Module1.61 | length 71.8
  F.Cu w0.13: Module1.61@1.3,12.6 1.7,12.6 3.95,10.35 3.95,-33.35 7.95,-37.35 7.95,-38.85 8.3,-39.2 8.3,-41.8 9.8,-43.3 9.8,-50.4 8.5,-51.7 6.4,-51.7 6.16,-51.94 J7.2@6.16,-52.675
SD_DET: Module1.76 R18.1 | length 56.8
  F.Cu w0.13: v1(-2.9,15) -2.5,15.4 Module1.76@-1.78,15.4 ; v1(1.2,-1.8) 2.1,-1.8 2.7,-2.4 2.7,-27.4 v1(1.9,-28.2) ; R18.1@6.45,-28.1 7.18,-28.1 v1(7.28,-28.2)
  B.Cu w0.13: v1(-2.9,15) -2.9,14.2 -1.5,12.8 -0.1,12.8 0,12.7 0.8,12.7 3.1,10.4 3.1,9.6 2.8,9.3 2.8,0.7 1.2,-0.9 v1(1.2,-1.8) ; v1(1.9,-28.2) v1(7.28,-28.2)
SD_PWR: C5.1 J7.4 U18.1 | length 32.4
  F.Cu w0.5: J7.4@3.96,-52.675 3.96,-51.74 v1(4,-51.7) ; v1(4,-39.45) C5.1@4,-38.537 ; v1(8.699,-23.999) U18.1@8.699,-23.106
  B.Cu w0.5: v1(4,-51.7) v1(4,-39.45) 6.7,-36.75 6.7,-32.7 8.699,-30.701 v1(8.699,-23.999)
SD_PWR_ON: Module1.75 R29.2 U18.4 | length 39.1
  F.Cu w0.13: Module1.75@1.3,15.4 1.9,15.4 5.6,11.7 5.6,-18.285 R29.2@6.115,-18.8 6.115,-19.665 6.499,-20.049 U18.4@6.499,-21.206
SDA0: J5.21 J16.21 Module1.82 U8.5 U11.1 | length 194.6
  F.Cu w0.13: v1(-104.3,1.5) -103.2,1.5 -102.5,0.8 -100.35,0.8 -99.95,0.4 -99.95,-4.65 -91.655,-12.945 U8.5@-89.675,-12.945 ; v1(-102,6) -96.5,11.5 -96.5,23.1 -100.95,27.55 J5.21@-100.95,28.55 -100.95,30.55 v1(-100.7,30.8) ; v1(-65.01,30.55) -64.95,30.49 J16.21@-64.95,28.55 -64.95,27.77 -62.51,25.33 -20.904,25.33 -20.509,25.725 -18.925,25.725 v1(-18.7,25.5) -18.475,25.275 -9.425,25.275 -8.9,25.8 v1(-7,25.8) ; v1(-12.481,18.659) -10.327,16.505 -2.812,16.505 -2.717,16.6 Module1.82@-1.78,16.6
  F.Cu w0.23: v1(3.225,30.425) U11.1@7.638,30.425
  B.Cu w0.13: v1(-104.3,1.5) -102,3.8 v1(-102,6) ; v1(-100.7,30.8) -100.351,31.149 -66.624,31.149 -65.975,30.5 -65.06,30.5 v1(-65.01,30.55) ; v1(-18.7,25.5) -18.475,25.275 -18.475,23.775 -14.2,19.5 -13.322,19.5 v1(-12.481,18.659) ; v1(-7,25.8) -4.9,27.9 0.7,27.9 v1(3.225,30.425)
SDA1: J4.21 J6.4 J15.21 R6.2 | length 62.2
  F.Cu w0.13: J4.21@-110.35,16.65 -108.35,16.65 v1(-108.3,16.6) ; v1(-92.702,15.72) -92.68,15.72 v1(-83.3,25.1) ; J15.21@-82.95,28.55 -82.95,27.35 -82.3,26.7 v1(-81.9,26.7) R6.2@-80.985,26.7 ; v1(-82.3,15.7) -73.26,6.66 J6.4@-73.26,4.74
  B.Cu w0.13: v1(-108.3,16.6) -107.42,15.72 v1(-92.702,15.72) -92.477,15.945 -82.545,15.945 v1(-82.3,15.7) ; v1(-83.3,25.1) -81.9,26.5 v1(-81.9,26.7)
SYNC_IN: J2.8 Module1.16 | length 65.7
  F.Cu w0.13: J2.8@-49.58,33.44 -48.34,32.2 -43.9,32.2 -43.2,31.5 -43.2,30.4 -40.9,28.1 -25.4,28.1 v1(-24.5,27.2) ; v1(-16.5,15.9) -10,9.4 -10,6.9 -6.2,3.1 -2.607,3.1 -2.307,3.4 Module1.16@-1.78,3.4
  B.Cu w0.13: v1(-24.5,27.2) -24.5,26.6 -17.85,19.95 -16.65,19.95 -16,19.3 -16,16.4 v1(-16.5,15.9)
SYNC_OUT: J2.9 Module1.18 | length 59
  F.Cu w0.13: J2.9@-47.04,30.9 -43.465,27.325 -27.325,27.325 v1(-27.1,27.1) ; v1(-17.75,19.15) -17.75,17.85 -9.5,9.6 -9.5,7 -6,3.5 -2.674,3.5 -2.374,3.8 Module1.18@-1.78,3.8
  B.Cu w0.13: v1(-27.1,27.1) -26.5,26.5 -25.9,26.5 -19.15,19.75 -18.35,19.75 v1(-17.75,19.15)
TR0_TAP: J9.3 U3.11 | length 34.5
  B.Cu w0.23: -50.1,-39.25 -50.05,-39.25 U3.11@-48.71,-40.59
  B.Cu w1: J9.3@-57,-9.54 -57,-32.35 -50.1,-39.25
TR1_TAP: J9.1 U3.12 | length 65.2
  B.Cu w0.23: -51.83,-49.1 -51.8,-49.13
  B.Cu w0.5: -52,-47.7 -51.83,-47.87 -51.83,-50.07 -50.9,-51 -50.9,-51.45
  B.Cu w1: J9.1@-56.97,-6.97 -58.07,-6.97 -59.4,-8.3 -59.4,-40.3 -52,-47.7 ; -50.9,-51.45 -50.45,-51.9 -46.1,-51.9 -44.55,-50.35 -44.55,-44.3 U3.12@-46.15,-42.7
TR2_TAP: J9.2 U3.13 | length 77.9
  B.Cu w0.23: -33.8,-39.7 -33.67,-39.83 -33.67,-40.1 -32.716,-42.466
  B.Cu w0.5: -34.9,-51.5 -34.85,-51.5 ; -34.15,-44.85 -34.15,-44.45 -32.716,-43.016 -32.716,-42.466 ; -33.8,-39.7 -33.8,-38.1 -33,-37.3
  B.Cu w0.7: -41.3,-51.5 -34.9,-51.5
  B.Cu w1: J9.2@-54.43,-6.97 -53.23,-6.97 -33,-27.2 -33,-37.1 ; U3.13@-40.31,-43.01 -42,-44.7 -42,-50.8 -41.3,-51.5 -34.85,-51.5 -34,-50.65 -34,-47.8 -34.15,-47.65 -34.15,-44.85
TR3_TAP: J9.4 U3.14 | length 42.9
  B.Cu w0.23: U3.14@-37.485,-41.27 -37.15,-40.55 -35.3,-39.55
  B.Cu w0.5: -35.485,-39.55 -35.3,-39.55 -35.3,-37.05 -35.3,-35.163
  B.Cu w1: J9.4@-54.39,-9.51 -35.3,-28.6 -35.3,-37.05
TRD0_N: Module1.10 U2.4 U2.7 U3.2 | length 66.7
  F.Cu w0.127: U3.2@-47.8,-38.595 -47.8,-34.9 -47.36,-34.46 -47.36,-33.743 -47.3,-33.683 U2.7@-47.3,-33.27 -47.3,-32.857 -47.36,-32.797 U2.4@-47.36,-32.685 ; U2.4@-47.3,-32.5 -47.3,-32.087 -47.36,-32.028 -47.36,-31.529 -36.021,-20.19 -32.521,-20.19 -28.021,-15.69 -21.621,-15.69 -3.721,2.21 -2.315,2.21 -2.305,2.2 Module1.10@-1.78,2.2
TRD0_P: Module1.12 U2.5 U2.6 U3.1 | length 67.4
  F.Cu w0.127: U3.1@-48.915,-36.21 -48.915,-35.315 -49.38,-34.85 -49.4,-34.85 -49.7,-34.55 -49.7,-34.15 -49.5,-33.95 -48.7,-33.95 -48.35,-34.3 -47.85,-34.3 -47.74,-34.19 -47.74,-34.14 -47.74,-33.743 -47.8,-33.683 U2.6@-47.8,-33.27 -47.8,-32.857 -47.74,-32.797 U2.5@-47.74,-32.685 ; U2.5@-47.8,-32.5 -47.8,-32.087 -47.74,-32.028 -47.74,-31.371 -36.179,-19.81 -32.679,-19.81 -28.179,-15.31 -21.779,-15.31 -3.879,2.59 -2.315,2.59 -2.305,2.6 Module1.12@-1.78,2.6
TRD1_N: Module1.6 U2.2 U2.9 U3.6 | length 69.7
  F.Cu w0.127: U2.2@-46.3,-32.5 -46.3,-32.087 -46.24,-32.028 -46.24,-31.071 -35.879,-20.71 -32.379,-20.71 -27.779,-16.11 -21.379,-16.11 -3.879,1.39 -2.315,1.39 -2.305,1.4 Module1.6@-1.78,1.4 ; U2.2@-46.24,-32.685 -46.24,-32.797 -46.3,-32.857 U2.9@-46.3,-33.27 -46.3,-33.683 -46.24,-33.743 -46.24,-34.54 -47.4,-35.7 -47.4,-36.9 -46.9,-37.4 -43.915,-37.4 U3.6@-42.565,-38.75
TRD1_P: Module1.4 U2.1 U2.10 U3.3 | length 68.9
  F.Cu w0.127: U3.3@-46.375,-36.21 -46.375,-35.225 -45.95,-34.8 -45.8,-34.8 -45.4,-35.2 -45.2,-35.2 -45.15,-35.15 -45.15,-34.5 -45,-34.35 -44.85,-34.35 -44.75,-34.45 -44.75,-34.95 -44.7,-35 -44.55,-35 -44.5,-35 -44.45,-34.95 -44.45,-33.85 -44.55,-33.75 -44.55,-33.15 -44.65,-33.05 -45,-33.05 -45.1,-33.15 -45.1,-33.85 -45.45,-34.2 -45.75,-34.2 -45.86,-34.09 -45.86,-33.743 -45.8,-33.683 U2.10@-45.8,-33.27 -45.8,-32.857 -45.86,-32.797 U2.1@-45.86,-32.685 ; U2.1@-45.8,-32.5 -45.8,-32.087 -45.86,-32.028 -45.86,-31.229 -35.721,-21.09 -32.221,-21.09 -27.621,-16.49 -21.221,-16.49 -3.721,1.01 -2.315,1.01 -2.305,1 Module1.4@-1.78,1
TRD2_N: Module1.9 U1.4 U1.7 U3.8 | length 64.9
  F.Cu w0.127: U1.4@-41.36,-32.685 -41.36,-32.797 -41.3,-32.857 U1.7@-41.3,-33.27 -41.3,-34.4 -40.9,-34.8 -40.6,-34.8 -40.2,-35.2 U3.8@-40.2,-38.575 ; U1.4@-41.3,-32.5 -41.3,-32.087 -41.36,-32.028 -41.36,-31.529 -27.221,-17.39 -20.821,-17.39 -3.921,-0.49 -1.021,-0.49 -0.51,0.021 -0.51,1.221 0.479,2.21 0.765,2.21 0.775,2.2 Module1.9@1.3,2.2
TRD2_P: Module1.11 U1.5 U1.6 U3.7 | length 65.4
  F.Cu w0.127: U1.5@-41.8,-32.5 -41.8,-32.087 -41.74,-32.028 -41.74,-31.371 -27.379,-17.01 -20.979,-17.01 -4.079,-0.11 -1.179,-0.11 -0.89,0.179 -0.89,1.379 0.321,2.59 0.765,2.59 0.775,2.6 Module1.11@1.3,2.6 ; U1.5@-41.74,-32.685 -41.74,-32.797 -41.8,-32.857 U1.6@-41.8,-33.27 -41.8,-33.9 -41.9,-34 -42.55,-34 -42.75,-34.2 -42.75,-34.65 -42.55,-34.85 -41.45,-34.85 -41.2,-35.1 -40.8,-35.1 -40.5,-35.4 -40.5,-35.415 U3.7@-41.295,-36.21
TRD3_N: Module1.5 U1.2 U1.9 U3.10 | length 64.3
  F.Cu w0.127: U1.2@-40.3,-32.5 -40.3,-32.087 -40.24,-32.028 -40.24,-31.071 -26.979,-17.81 -20.579,-17.81 -3.779,-1.01 -0.779,-1.01 0.01,-0.221 0.01,0.879 0.531,1.4 Module1.5@1.3,1.4 ; U1.2@-40.24,-32.685 -40.24,-32.797 -40.3,-32.857 U1.9@-40.3,-33.27 -40.3,-34 -39.8,-34.5 -39.8,-36.564 U3.10@-37.614,-38.75
TRD3_P: Module1.3 U1.1 U1.10 U3.9 | length 63.6
  F.Cu w0.127: U1.1@-39.86,-32.685 -39.86,-32.797 -39.8,-32.857 U1.10@-39.8,-33.27 -39.8,-33.85 -39.65,-34 -39.25,-34 -38.9,-33.65 -38.9,-33 -38.75,-32.85 -38.45,-32.85 -38.2,-33.1 -38.2,-34.35 -38.755,-34.905 U3.9@-38.755,-36.21 ; U1.1@-39.8,-32.5 -39.8,-32.087 -39.86,-32.028 -39.86,-31.229 -26.821,-18.19 -20.421,-18.19 -3.621,-1.39 -0.621,-1.39 0.39,-0.379 0.39,0.721 0.669,1 Module1.3@1.3,1
TV_OUT: J2.11 Module1.111 | length 55.5
  F.Cu w0.1: J2.11@-44.5,30.9 -41.305,27.705 -25.905,27.705 v1(-25.4,27.2) ; Module1.111@-32.605,2.585 -28.815,2.585 -19.3,12.1 -19.3,20.5 v1(-19.35,20.55)
  B.Cu w0.1: v1(-25.4,27.2) -25.4,26.6 v1(-19.35,20.55)
USB2_N: Module1.103 U13.4 | length 32.6
  F.Cu w0.147: Module1.103@-32.62,1 -33.217,1 -33.5,0.717 -33.5,-0.517 -25.817,-8.2 -24.117,-8.2 -23.5,-8.817 -23.5,-13.15 v1(-23.35,-13.3) ; U13.4@-21.1,-21.6 -20.05,-21.6 -20,-21.55 -19.667,-21.55 -19.365,-21.247 v1(-19.153,-21.247)
  B.Cu w0.147: v1(-23.35,-13.3) -23.5,-13.45 -23.5,-14.417 -18.6,-19.317 -18.6,-20.483 -19.153,-21.035 v1(-19.153,-21.247)
USB2_P: Module1.105 U13.3 | length 32.6
  F.Cu w0.147: Module1.105@-32.62,1.4 -33.383,1.4 -33.9,0.883 -33.9,-0.683 -25.983,-8.6 -24.283,-8.6 -23.9,-8.983 -23.9,-13.15 v1(-24.05,-13.3) ; U13.3@-21.1,-21.1 -20.05,-21.1 -20,-21.15 -19.833,-21.15 -19.647,-20.965 v1(-19.647,-20.753)
  B.Cu w0.147: v1(-24.05,-13.3) -23.9,-13.45 -23.9,-14.583 -19,-19.483 -19,-20.317 -19.435,-20.753 v1(-19.647,-20.753)
USBD_N: J11.2 U4.4 U4.7 U13.8 | length 45.5
  F.Cu w0.147: U13.8@-16.7,-21.1 -15.65,-21.1 -15.6,-21.05 -14.95,-21.05 -14.917,-21.054 -14.886,-21.065 -14.858,-21.082 -14.835,-21.106 -14.817,-21.134 -14.806,-21.165 -14.799,-21.231 -14.788,-21.262 -14.77,-21.29 -14.747,-21.313 -14.719,-21.331 -14.687,-21.342 -14.655,-21.345 -14.45,-21.345 -14.417,-21.342 -14.386,-21.331 -14.358,-21.313 -14.335,-21.29 -14.317,-21.262 -14.306,-21.231 -14.299,-21.165 -14.288,-21.134 -14.27,-21.106 -14.247,-21.082 -14.219,-21.065 -14.187,-21.054 -14.155,-21.05 -13.95,-21.05 -13.917,-21.054 -13.886,-21.065 -13.858,-21.082 -13.835,-21.106 -13.817,-21.134 -13.806,-21.165 -13.799,-21.231 -13.788,-21.262 -13.77,-21.29 -13.747,-21.313 -13.719,-21.331 -13.687,-21.342 -13.655,-21.345 -13.45,-21.345 -13.417,-21.342 -13.386,-21.331 -13.358,-21.313 -13.335,-21.29 -13.317,-21.262 -13.306,-21.231 -13.299,-21.165 -13.288,-21.134 -13.27,-21.106 -13.247,-21.082 -13.219,-21.065 -13.187,-21.054 -13.155,-21.05 -6.833,-21.05 -2.4,-25.483 -2.4,-28.552 -2.45,-28.602 U4.7@-2.45,-29.015 -2.45,-29.428 -2.4,-29.478 U4.4@-2.4,-29.61 ; J11.2@-9.725,-49.28 -9.725,-48.642 -8.883,-47.8 -5.483,-47.8 -4.5,-46.817 -4.5,-40.317 -2.4,-38.217 -2.4,-30.248 -2.45,-30.198 U4.4@-2.45,-29.785
USBD_P: J11.3 U4.5 U4.6 U13.9 | length 45.5
  F.Cu w0.147: U13.9@-16.7,-20.6 -15.65,-20.6 -15.6,-20.65 -6.667,-20.65 -2,-25.317 -2,-28.552 -1.95,-28.602 U4.6@-1.95,-29.015 -1.95,-29.428 -2,-29.478 U4.5@-2,-29.61 ; J11.3@-9.325,-49.28 -9.325,-48.808 -8.717,-48.2 -5.317,-48.2 -4.1,-46.983 -4.1,-40.483 -2,-38.383 -2,-30.248 -1.95,-30.198 U4.5@-1.95,-29.785
USBH_N: U6.30 U13.6 | length 17.2
  F.Cu w0.147: U6.30@-19.583,-31.418 -20.645,-31.418 -20.65,-31.423 -21.342,-31.423 -21.347,-31.418 -21.499,-31.418 -21.8,-31.117 -21.8,-30.117 -22.8,-29.117 -22.8,-28.35 -22.798,-28.333 -22.793,-28.317 -22.784,-28.303 -22.772,-28.291 -22.758,-28.282 -22.742,-28.277 -22.708,-28.273 -22.692,-28.268 -22.678,-28.259 -22.666,-28.247 -22.657,-28.233 -22.652,-28.217 -22.65,-28.2 -22.65,-27.9 -22.652,-27.883 -22.657,-27.867 -22.666,-27.853 -22.678,-27.841 -22.692,-27.832 -22.708,-27.827 -22.742,-27.823 -22.758,-27.818 -22.772,-27.809 -22.784,-27.797 -22.793,-27.783 -22.798,-27.767 -22.8,-27.75 -22.8,-25.583 -22.584,-25.366 -22.54,-25.332 -22.489,-25.307 -22.435,-25.295 -22.379,-25.295 -22.324,-25.307 -22.274,-25.332 -22.186,-25.401 -22.136,-25.426 -22.081,-25.438 -22.025,-25.438 -21.971,-25.426 -21.92,-25.401 -21.876,-25.366 -21.842,-25.323 -21.817,-25.272 -21.805,-25.218 -21.805,-25.162 -21.817,-25.107 -21.842,-25.057 -21.911,-24.969 -21.936,-24.919 -21.948,-24.864 -21.948,-24.808 -21.936,-24.754 -21.911,-24.703 -21.876,-24.659 -21.833,-24.624 -21.782,-24.6 -21.728,-24.588 -21.672,-24.588 -21.617,-24.6 -21.567,-24.624 -21.479,-24.694 -21.429,-24.719 -21.374,-24.731 -21.318,-24.731 -21.264,-24.719 -21.213,-24.694 -21.169,-24.659 -21.134,-24.616 -21.11,-24.565 -21.098,-24.511 -21.098,-24.455 -21.11,-24.4 -21.134,-24.35 -21.204,-24.262 -21.229,-24.212 -21.241,-24.157 -21.241,-24.101 -21.229,-24.046 -21.204,-23.996 -21.169,-23.952 -20.517,-23.3 -19.417,-23.3 -18.167,-22.05 -17.8,-22.05 -17.75,-22.1 U13.6@-16.7,-22.1
USBH_P: U6.31 U13.7 | length 17.2
  F.Cu w0.147: U6.31@-19.583,-31.818 -20.479,-31.818 -20.485,-31.823 -21.507,-31.823 -21.512,-31.818 -21.665,-31.818 -22.2,-31.283 -22.2,-30.283 -23.2,-29.283 -23.2,-25.417 -20.683,-22.9 -19.583,-22.9 -18.333,-21.65 -17.8,-21.65 -17.75,-21.6 U13.7@-16.7,-21.6
USBOTG: Module1.101 R8.2 R11.1 U13.2 | length 61.3
  F.Cu w0.13: Module1.101@-32.62,0.6 -30.4,0.6 v1(-20.9,-8.9) ; R11.1@-24.4,-20.315 -24.915,-20.315 -25.2,-20.6 -25.2,-21.6 -24.7,-22.1 -23.4,-22.1 ; R11.1@-24.4,-20.3 -23.5,-19.4 -20.7,-19.4 -20.6,-19.3 -16.5,-19.3 -6.5,-9.3 v1(-6.3,-9.3) ; R8.2@-23.32,-23.15 -23.32,-22.18 -23.4,-22.1 ; U13.2@-21.1,-20.6 -21.92,-20.6 -22.11,-20.79 -22.11,-21.21 -23,-22.1 -23.4,-22.1
  B.Cu w0.13: v1(-20.9,-8.9) -20.5,-9.3 v1(-6.3,-9.3)
VBUS: C16.1 C17.1 C19.1 C20.1 C21.1 J13.1 J13.5 J14.1 J14.2 U7.6 | length 69.2
  F.Cu w0.5: v1(-9.075,-33.025) -9.1,-33 -9.1,-32.537 C21.1@-8.563,-32 ; -7.75,-29.35 U7.6@-7.75,-27.2 ; U7.6@-7.6,-27.2 -7.25,-27.55 -7.25,-29.75 v1(-6,-31) ; v1(-6.5,-33.15) -6.375,-33.025 C19.1@-6.375,-32
  F.Cu w1: C17.1@-28.813,-36.573 -28.812,-37.487 -27.7,-38.6 -27.7,-40.47 -26.937,-39.707 C20.1@-26.937,-37.2 ; -12.7,-39.2 J14.1@-9.5,-36 ; C21.1@-8.563,-32 -8.563,-31.187 v1(-9.075,-30.675) -7.75,-29.35 -7.65,-29.35 v1(-6,-31) ; U7.6@-7.6,-27.2 -6.862,-26.462 C16.1@-5.975,-26.462
  F.Cu w2: J13.1@-27.7,-40.47 -27.7,-43.09 -27.7,-44 -22,-49.7 -16.15,-49.7 -12.7,-46.25 -12.7,-39.2
  B.Cu w1: J14.1@-9.075,-35.875 v1(-9.075,-33.025) v1(-9.075,-30.675) ; J14.2@-6.66,-36 -6.66,-33.31 v1(-6.5,-33.15) -6,-32.65 v1(-6,-31)
WL_nDis: J3.1 Module1.89 | length 23.5
  F.Cu w0.13: Module1.89@1.3,18.2 9.2,18.2 11.3,20.3 v1(11.3,25.7)
  B.Cu w0.13: v1(11.3,25.7) J3.1@11.3,32.9
pads on no net: D4.Un1 H1.Un1 H2.Un1 H3.Un1 H4.Un1 H5.Un1 H6.Un1 H7.Un1 H8.Un1 J4.MP J5.MP J12.Un1 J12.Un2 J15.MP J16.MP J17.Un1 Module1.Un1 Module1.Un2 Module1.Un3 Module1.Un4 Q1.Un1 Q1.Un2 Q1.Un3 Q1.Un4 Q1.Un5 Q1.Un6 Q1.Un7 Q1.Un8 U3.Un1 U3.Un2 U5.1 U6.Un1 U6.Un2 U6.Un3 U6.Un4 U6.Un5 U6.Un6 U6.Un7 U6.Un8 U6.Un9 U9.1 U14.1 U15.Un1 U15.Un2 U15.Un3 U15.Un4 U15.Un5 U16.Un1 U16.Un2 U16.Un3 U16.Un4 U16.Un5

## Polygon pours and split planes (outlines as drawn)
GND on F.Cu "F.Cu-GND-8" (solid, remove dead copper, pour order 31): 16.4,-24.3 14.4,-24.3 14.3,34.9 16.4,34.9
GND on F.Cu "F.Cu-GND-7" (solid, remove dead copper, pour order 30): -4.2,28.9 -4.2,34.9 15.3,34.9 15.3,-54.1 -116.7,-54.1 -116.7,34.9 -20.2,34.9 -20.2,28.9
GND on F.Cu "F.Cu-GND-6" (solid, remove dead copper, pour order 29): 30.45,0.45 28.6,0.45 28.6,6.1 30.45,6.1
GND on F.Cu "F.Cu-GND-5" (solid, remove dead copper, pour order 28): 30.4,-30.212 28.55,-30.212 28.55,-24.563 30.4,-24.563
GND on F.Cu "F.Cu-GND-4" (solid, remove dead copper, pour order 21): 36.7,8.6 24.8,8.6 24.8,11.6 36.7,11.6
GND on F.Cu "F.Cu-GND-3" (solid, remove dead copper, pour order 20): 42.3,-54 16.1,-54 16.1,34.9 42.2,34.9
GND on F.Cu "F.Cu-GND-2" (solid, remove dead copper, pour order 27): 36.1,0.45 34,0.45 34,6.15 36.1,6.15
GND on F.Cu "F.Cu-GND-1" (solid, remove dead copper, pour order 26): 36.05,-30.212 33.95,-30.212 33.95,-24.513 36.05,-24.513
+12v on F.Cu "F.Cu-/+12v-1" (solid, remove dead copper, pour order 25): 32.85,-29.8 31.5,-29.8 31.5,-22.6 32.85,-22.6
+12v on F.Cu "F.Cu-/+12v" (solid, remove dead copper, pour order 24): 33.1,0.45 31.3,0.45 31.3,8.25 33.1,8.25
Net-(L3-Pad1) on F.Cu "F.Cu-Net-(L3-Pad1)" (solid, remove dead copper, pour order 23): 30.65,-18.862 28.45,-18.862 28.45,-15.963 30.65,-15.963
GND on F.Cu "F.Cu-GND" (solid, remove dead copper, pour order 22): 37.4,-22.063 25.3,-22.063 25.3,-19.262 37.4,-19.262
Net-(L5-Pad1) on F.Cu "F.Cu-Net-(L5-Pad1)" (solid, remove dead copper, pour order 13): 30.6,11.9 28.2,11.9 28.2,14.95 30.6,14.95
GND on In1.Cu "In1.Cu-GND-3" (solid, remove dead copper, pour order 33): -20.2,34.882 -20.2,28.918 -4.2,28.9 -4.2,34.859 19.25,34.85 18.8,-24.3 15.3,-24.3 15.3,-54.2 -116.7,-54.1 -116.7,34.9
GND on In1.Cu "In1.Cu-GND-2" (solid, remove dead copper, pour order 19): 29.4,11.8 29.4,11.7 35.1,11.7 35.1,8.5 29.4,8.5 29.4,11.7 29.3,11.7 29.3,11.9
GND on In1.Cu "In1.Cu-GND-1" (solid, remove dead copper, pour order 18): 35.243,-22.2 29.043,-22.2 29.043,-18.8 35.243,-18.8
GND on In1.Cu "In1.Cu-GND" (solid, remove dead copper, pour order 32): 42.3,34.9 16.05,34.95 16.05,-54.05 42.3,-54.1
GND on In2.Cu "In2.Cu-GND-3" (solid, remove dead copper, pour order 17): 35.36,-22.25 29.06,-22.25 29.06,-19.05 35.36,-19.05
/+3.3v on In2.Cu "In2.Cu-/+3.3v" (solid, remove dead copper, pour order 36): -11.625,-35.55 -24.175,-35.55 -24.175,-25.425 -11.625,-25.4
GND on In2.Cu "In2.Cu-GND-2" (solid, remove dead copper, pour order 16): 35.2,8.6 29.4,8.6 29.4,11.8 35.2,11.8
GND on In2.Cu "In2.Cu-GND-1" (solid, remove dead copper, pour order 35): -4.2,28.9 -4.2,34.9 22.8,34.9 22.8,-24.3 15.3,-24.3 15.3,-54.2 -116.7,-54.1 -116.7,34.9 -20.2,34.9 -20.2,28.9
GND on In2.Cu "In2.Cu-GND" (solid, remove dead copper, pour order 34): 42.3,34.9 22.3,34.9 22.25,0.9 22.25,0.85 22.25,-24.3 16.05,-24.25 16.05,-54.2 42.3,-54.2
GND on B.Cu "B.Cu-GND-4" (solid, remove dead copper, pour order 15): 35.25,8.45 29.15,8.45 29.15,11.85 35.25,11.85
GND on B.Cu "B.Cu-GND-3" (solid, remove dead copper, pour order 14): 35.3,-22.3 29.2,-22.3 29.2,-18.9 35.3,-18.9
GND on B.Cu "B.Cu-GND-2" (solid, remove dead copper, pour order 39): 15.3,-54.1 -116.7,-54.1 -116.7,34.9 -20.2,34.9 -20.2,28.9 -4.2,28.9 -4.2,34.9 15.3,34.9
GND on B.Cu "B.Cu-GND-1" (solid, remove dead copper, pour order 38): 16.85,-24.3 13.85,-24.3 13.9,34.9 16.9,34.9
GND on B.Cu "B.Cu-GND" (solid, remove dead copper, pour order 37): 42.3,-54.1 16.05,-54.1 16.05,34.9 42.3,34.9

## Keep-outs
Edge.Cuts:
  lines w0.05: -117.2,-51.1 ccw(c-113.7,-51.1) -113.7,-54.6 ; -117.2,-51.1 ccw(c-113.7,-51.1) -113.7,-54.6 ; -117.2,-51.1 -117.2,31.9 ; -117.2,-51.1 -117.2,31.9 ; -117.2,31.9 cw(c-113.7,31.9) -113.7,35.4 ; -117.2,31.9 cw(c-113.7,31.9) -113.7,35.4 ; -113.7,-54.6 39.3,-54.6 ; -113.7,-54.6 39.3,-54.6 ; -113.7,35.4 39.3,35.4 ; -113.7,35.4 39.3,35.4 ; 39.3,-54.6 ccw(c39.3,-51.1) 42.8,-51.1 ; 39.3,-54.6 ccw(c39.3,-51.1) 42.8,-51.1 ; 39.3,35.4 cw(c39.3,31.9) 42.8,31.9 ; 39.3,35.4 cw(c39.3,31.9) 42.8,31.9 ; 42.8,-51.1 42.8,31.9 ; 42.8,-51.1 42.8,31.9

## Other copper
F.Cu:
  text "Board thickness  : 1.56mm / Finished copper weight inners : 1oz / Finished copper weight outers : 1oz /  / Board finish : OSP / Material type : FR4 / Colour of solder resists : Green / Colour of silk screens : White Only on the top side / Board to : UL94-V0 / TG >=130 /  / 50R trace width 0.13mm@ 3GHz / 90R diff pair width 0.147 spacing 0.253mm @ 2.5GHz / 100R diff pair width 0.127 spacing 0.253mm @ 2GHz" at -178.09,52.316 h1.5

## Silkscreen, mask and mechanical layers (free items; w line width, h text height)
F.SilkS:
  lines w0.12: -60.1,23 -57.7,23 -57.2,23 -57.2,24.4 ; -57.6,24 -57.2,24.4 ; -56.8,24 -57.2,24.4 ; -55.1,20.9 -54.7,20.9 -54.7,24.4 ; -55.1,24 -54.7,24.4 ; -54.3,24 -54.7,24.4 ; -4,23.9 -2.5,23.9 ; -2.9,23.5 -2.5,23.9 ; -2.5,23.9 -2.9,24.3 -2.5,23.9
  text "J3 : nBT_Dis GND" at -28.315,32.76 h1
  text "nWireless_Dis" at -13.997,32.76 h1
  text "FAN" at 33.053,26.55 h1
  text "CAM1" at -107.688,25.75 h1
  text "DISP0" at -89.623,25.75 h1
  text "DISP1" at -70.909,25.75 h1
  text "Fit for 1.8v GPIO" at -16.594,25.626 h1
  text "Fit for 3.3v GPIO" at -16.699,23.226 h1
  text "Fit jumper to disable eMMC Boot" at -86.85,22.16 h1
  text "CAM0" at -115.402,20.675 h1
  text "Fit jumper to disable writing to EEPROM" at -86.85,19.96 h1
  text "Ext PSU" at 17.012,19.35 h1
  text "Raspberry Pi  / Compute Module 4 IO Board" at -90.35,11.976 h2
  text "Fit two jumpers  / For CAM0 and DISP0" at -72.3,7.18 h1
  text "Raspberry Pi HAT" at -104.978,1.119 h2
  text "PCIe x1" at 8.1,-4.537 h2 r90
  text "Compute Module 4" at -29.264,-7.233 h2
  text "POE" at -62.102,-10.25 h1
  text "Ethernet" at -49.804,-30.4 h2
  text "RUN    GLOBAL_EN" at -106.572,-33.917 h1
  text "External USB" at -10.559,-34.25 h1
  text "uSDCARD" at -1.513,-36.6 h2
  text "Battery CR2032" at -114.383,-38.563 h1 r90
  text "HDMI1" at -72.778,-42.35 h2
  text "HDMI0" at -98.256,-42.55 h2
  text "NB uSDCARD  / only used for  / CM4 modules  / without eMMC" at 13.306,-48.68 h1
  text "USB Slave" at -9.625,-48.95 h1
  text "Rev 5b" at -97.792,-50.85 h1.5
  text "USB" at -31.9,-53.399 h2 r90
  text "12v DC Input / Tip +ve" at 19.57,-53.587 h1

## Dimensions
-69.2,-63.6 to -94.2,-63.6 on Dwgs.User
-83.5,-53.5 to -79.85,-53.5 on Dwgs.User
-117.2,30.4 to -105.7,30.4 on Dwgs.User
4.05,-55.6 to 12.8,-55.6 on Dwgs.User
-24.2,-52 to -9.2,-52 on Dwgs.User
-83.5,-53.75 to -79.85,-53.75 on Dwgs.User
-117.2,-51.1 to -55.7,-51.1 on Dwgs.User
-43.2,-63.6 to -69.2,-63.6 on Dwgs.User
-112.2,22.4 to -112.2,11.9 on Dwgs.User
-106.2,-54.6 to -106.2,22.4 on Dwgs.User
36.05,-54.65 to 4.05,-54.65 on Dwgs.User
12.8,-46.6 to 12.8,2.9 on Dwgs.User
42.8,-54.6 to -117.2,-54.6 on Dwgs.User
-121.2,-54.6 to -121.2,-51.1 on Dwgs.User
-106.2,-54.25 to -83.5,-54.25 on Dwgs.User
-113.7,-61.6 to -94.2,-61.6 on Dwgs.User
-117.2,-46.6 to 27.8,-46.6 on Dwgs.User
-121.2,35.4 to -121.2,-54.6 on Dwgs.User
-87.7,30.4 to -69.7,30.4 on Dwgs.User
-113.7,-63.6 to -117.2,-63.6 on Dwgs.User
-106.2,-53.5 to -83.5,-53.5 on Dwgs.User
-105.7,30.4 to -87.7,30.4 on Dwgs.User
-9.2,-59.6 to 4.05,-59.6 on Dwgs.User
-43.2,-58.1 to -24.2,-58.1 on Dwgs.User
-125.7,-54.6 to -125.7,-2.1 on Dwgs.User
-106.2,-54.6 to -106.2,-46.6 on Dwgs.User
27.8,-54.6 to 27.8,-46.6 on Dwgs.User
-117.2,22.4 to -106.2,22.4 on Dwgs.User

## Text inside footprints (layer, text, board x,y; h text height)
J15: F.Fab "${REFERENCE}" at -92.473,33.188 h1
J16: F.Fab "${REFERENCE}" at -74.473,33.188 h1
J17: F.Fab "${REFERENCE}" at 27.177,32.738 h1
J19: F.Fab "${REFERENCE}" at 34.012,-50.073 h1 r90
L3: F.Fab "${REFERENCE}" at 26.712,-21.085 h1 r90
L5: F.Fab "${REFERENCE}" at 26.562,9.677 h1 r90
Q1: F.Fab "${REFERENCE}" at 36.933,-39.436 h0.7 r90
R1: F.Fab "${REFERENCE}" at -80.24,-52.262 h0.25 r90
R2: F.Fab "${REFERENCE}" at -35.77,-34.196 h0.25 r90
R3: F.Fab "${REFERENCE}" at -34.07,-34.281 h0.25 r90
R4: F.Fab "${REFERENCE}" at -2.591,25.939 h0.5
R5: F.Fab "${REFERENCE}" at -2.591,23.439 h0.5
R6: F.Fab "${REFERENCE}" at -81.696,26.47 h0.25
R7: F.Fab "${REFERENCE}" at -81.696,25.07 h0.25
R8: F.Fab "${REFERENCE}" at -23.831,-23.18 h0.25
R9: F.Fab "${REFERENCE}" at 30.48,13.954 h0.25 r90
R10: F.Fab "${REFERENCE}" at -82.37,-52.196 h0.25 r90
R11: F.Fab "${REFERENCE}" at -24.17,-21.996 h0.25 r90
R12: F.Fab "${REFERENCE}" at -16.582,-28.127 h0.25 r90
R13: F.Fab "${REFERENCE}" at -15.058,-28.04 h0.25 r90
R14: F.Fab "${REFERENCE}" at -22.58,-28.852 h0.25
R15: F.Fab "${REFERENCE}" at -22.245,-36.721 h0.25 r90
R16: F.Fab "${REFERENCE}" at -17.852,-28.127 h0.25 r90
R17: F.Fab "${REFERENCE}" at 6.73,-26.731 h0.25 r90
R18: F.Fab "${REFERENCE}" at 6.68,-29.781 h0.25 r90
R19: F.Fab "${REFERENCE}" at -73.956,-13.744 h0.25 r90
R20: F.Fab "${REFERENCE}" at -70.908,-13.744 h0.25 r90
R21: F.Fab "${REFERENCE}" at 8.504,26.47 h0.25
R22: F.Fab "${REFERENCE}" at 30.38,-16.973 h0.25 r90
R23: F.Fab "${REFERENCE}" at 32.98,-15.608 h0.25 r90
R24: F.Fab "${REFERENCE}" at 34.38,-16.608 h0.25 r90
R25: F.Fab "${REFERENCE}" at 33.03,15.254 h0.25 r90
R26: F.Fab "${REFERENCE}" at 31.28,-38.046 h0.25 r90
R27: F.Fab "${REFERENCE}" at 34.53,13.854 h0.25 r90
R28: F.Fab "${REFERENCE}" at 35.93,10.804 h0.25 r90
R29: F.Fab "${REFERENCE}" at 5.404,-19.03 h0.25
R30: F.Fab "${REFERENCE}" at 35.88,-20.258 h0.25 r90
R36: F.Fab "${REFERENCE}" at -10.346,-28.88 h0.25
TP1: B.Fab "${REFERENCE}" at 27.023,-4.112 h1
TP2: B.Fab "${REFERENCE}" at 36.023,-1.712 h1
TP3: B.Fab "${REFERENCE}" at -75.016,-53.612 h1
TP4: B.Fab "${REFERENCE}" at 24.973,9.188 h1
TP5: B.Fab "${REFERENCE}" at -78.327,-53.612 h1
TP6: B.Fab "${REFERENCE}" at 38.673,-18.862 h1
U1: F.Fab "${REFERENCE}" at -43.443,-33.404 h0.55
U2: F.Fab "${REFERENCE}" at -49.443,-33.404 h0.55
U3: F.Fab "${REFERENCE}" at -47.973,-46.012 h1
U4: F.Fab "${REFERENCE}" at -5.593,-29.919 h0.55
U5: F.Fab "${REFERENCE}" at -82.986,-48.356 h0.5
U6: F.Fab "${REFERENCE}" at -15.684,-37.141 h1 r90
U7: F.Fab "${REFERENCE}" at -11.086,-26.556 h0.5
U8: F.Fab "${REFERENCE}" at -91.88,-15.747 h0.98
U9: F.Fab "${REFERENCE}" at 4.956,19.314 h0.5 r90
U11: F.Fab "${REFERENCE}" at 5.027,28.488 h1
U12: F.Fab "${REFERENCE}" at -84.486,-44.356 h0.5
U13: F.Fab "${REFERENCE}" at -21.824,-21.707 h0.6
U14: F.Fab "${REFERENCE}" at -68.126,-15.458 h0.5 r90
U15: F.Fab "${REFERENCE}" at 33.047,-25.343 h0.98 r90
U16: F.Fab "${REFERENCE}" at 33.097,5.37 h0.98 r90
U18: F.Fab "${REFERENCE}" at 8.055,-24.542 h0.5 r90
Y1: F.Fab "${REFERENCE}" at -25.988,-33.473 h1 r90
Y2: F.Fab "${REFERENCE}" at -82.438,-21.173 h1 r90